# Altium PCB PCB1.PcbDoc
Units mil, origin at the board's own origin, x right, y up, seen from the top; angles counter-clockwise.
Board outline 5960 x 3955 mil, 2 copper layers (Top Layer, Bottom Layer); 43 components, 42 nets, 138 pads, 42 vias.
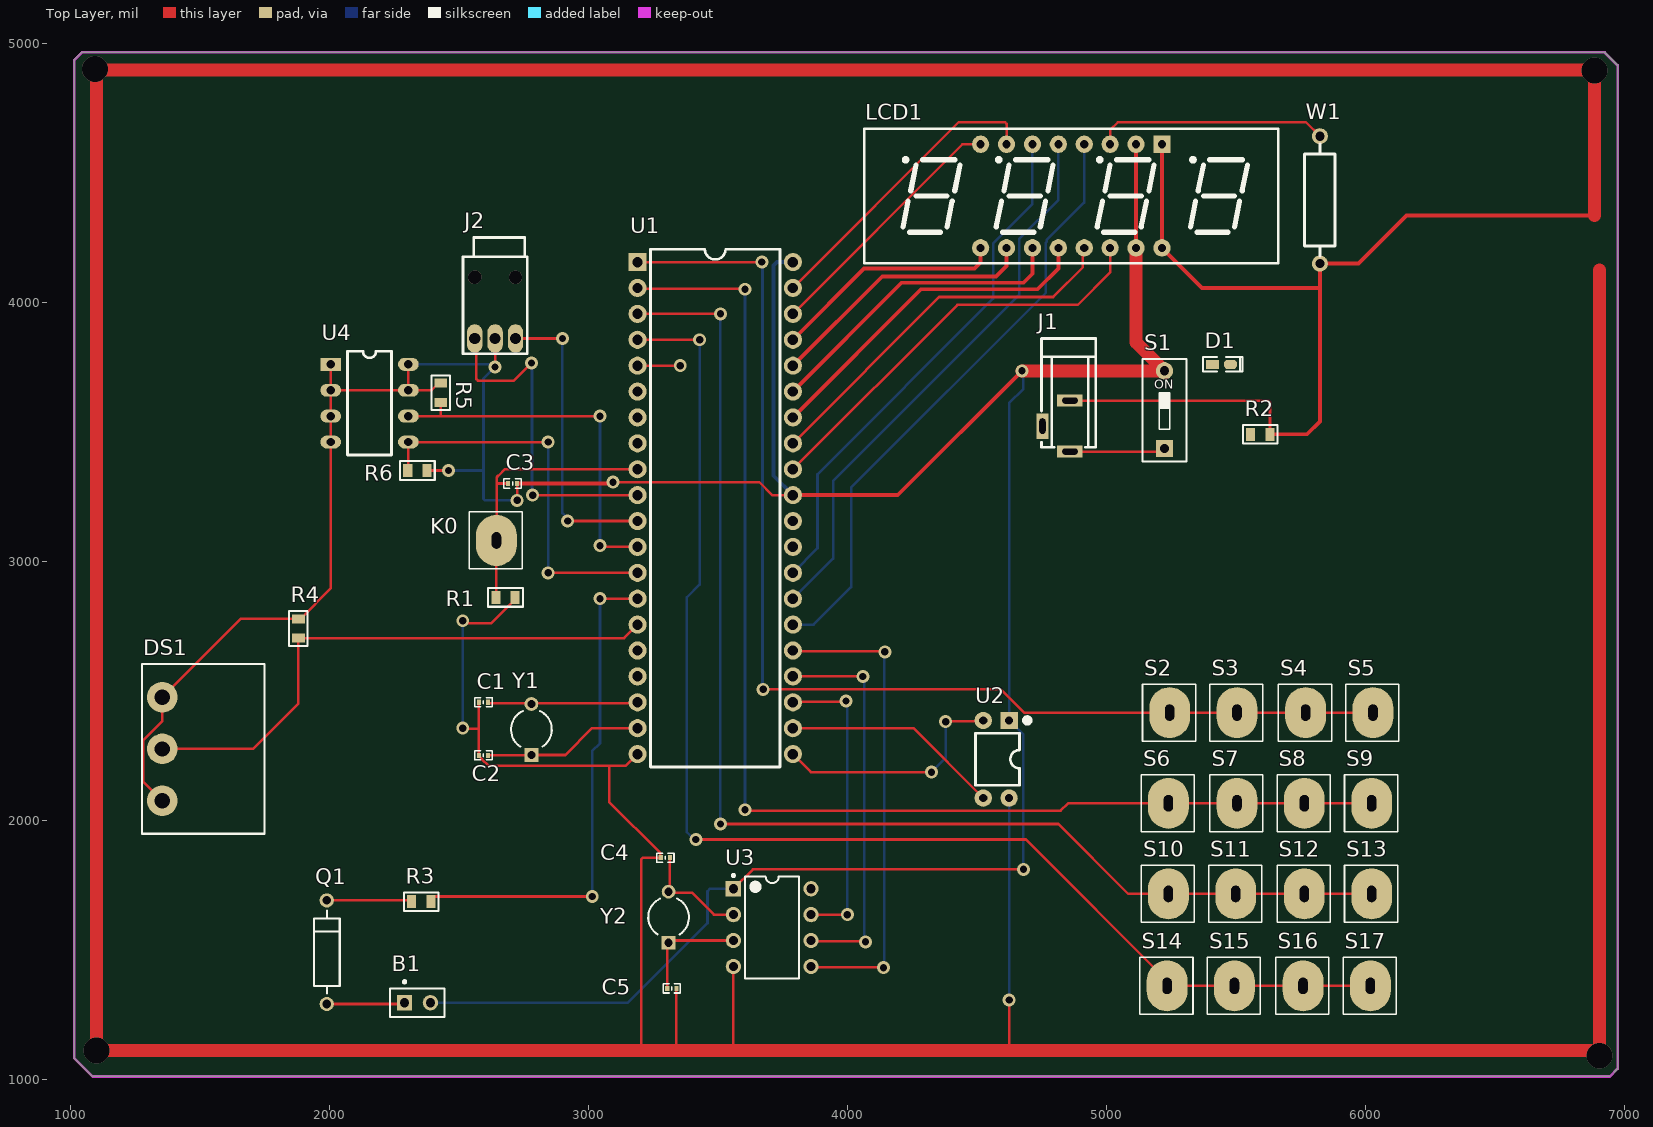
[diagram p0: Top Layer view]
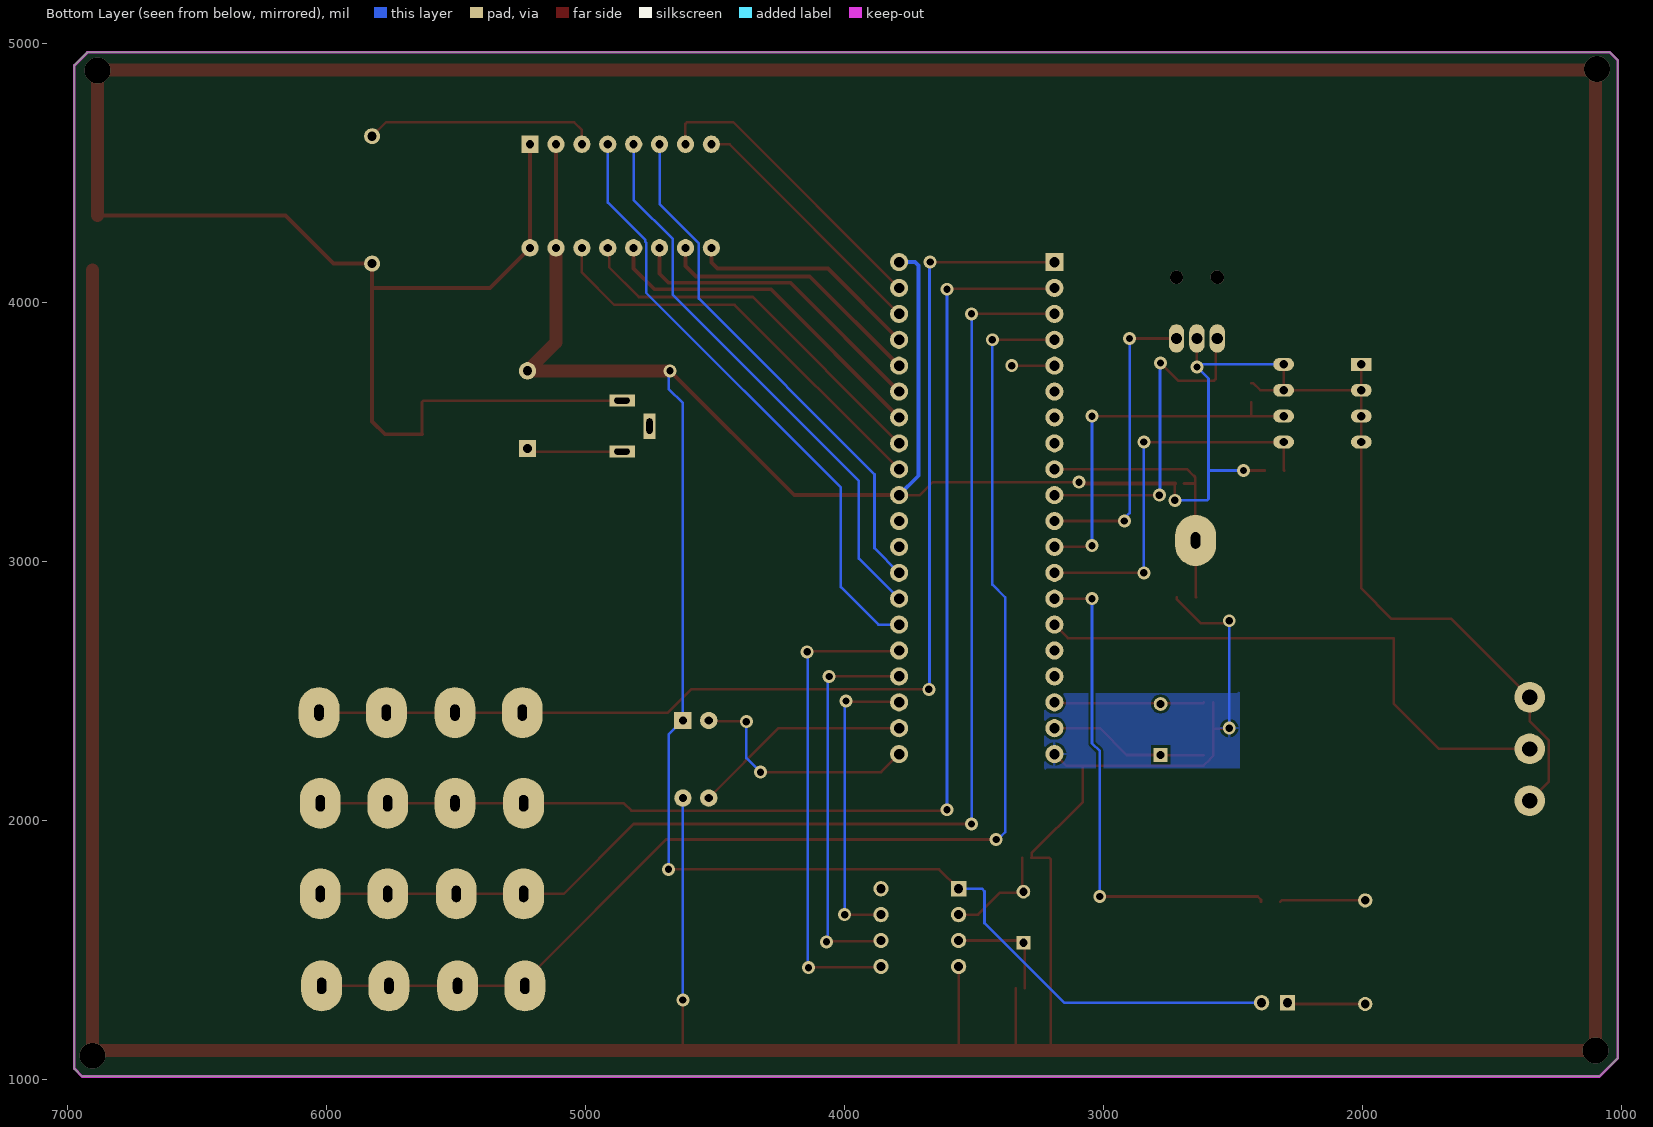
[diagram p1: Bottom Layer view, seen from below]
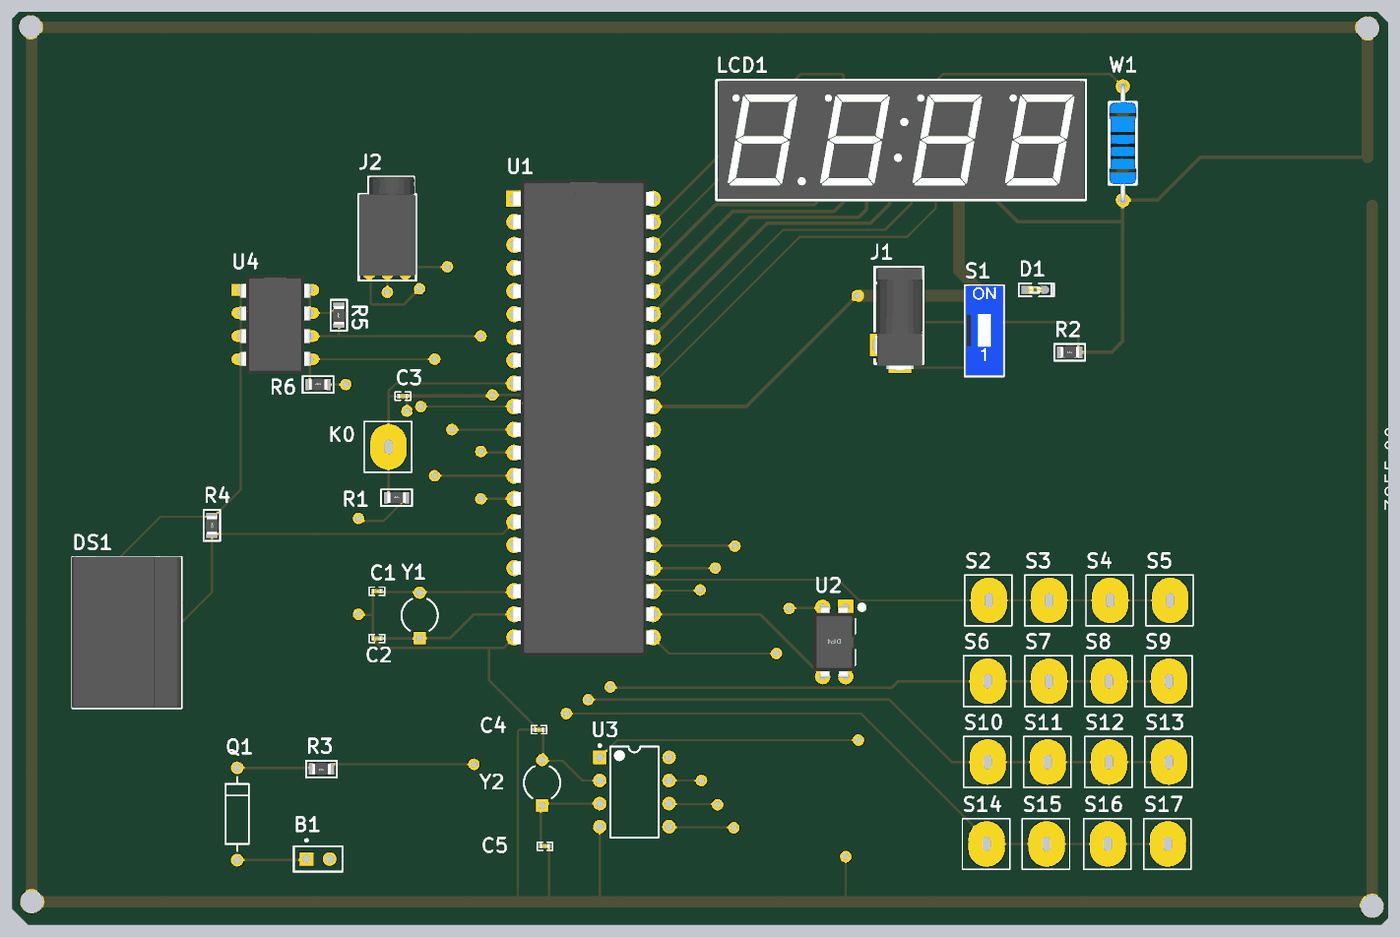
[diagram p2: 3D render of the assembled board from above, using the file's embedded part models]

## Layer stack, top to bottom
Top Solder: solder mask 0.4, Solder Resist, Dk 3.5
Top Layer: signal copper 1.4
Dielectric 1: dielectric 12.6, FR-4, Dk 4.8
Bottom Layer: signal copper 1.4
Bottom Solder: solder mask 0.4, Solder Resist, Dk 3.5

## Board outline
1015,1080 1015,4935 1045,4965 6925,4965 6975,4915 6975,1040 6945,1010 1085,1010

## Design rules (kind name [scope] priority, off if disabled: settings)
Clearance [All] p1: gap=10 ignorepadtopadclearanceinfootprint=FALSE except(0: Arc-Hole Track-Hole SMDPad-Hole THPad-Hole Via-Hole Fill-Hole Poly-Hole Region-Hole Text-Hole)
PolygonConnect [All] p1: connectstyle=Relief reliefconductorwidth=10 reliefentries=4 polygonreliefangle="90 Angle" airgapwidth=10
RoutingVias [All] p1: holewidth=28 width=50 viastyle="Through Hole" minholewidth=28 minwidth=50 maxholewidth=28 maxwidth=50
SolderMaskExpansion [All] p1: expansion=4 istentingtop=FALSE
Width [All] p1: maxlimit=50 minlimit=10 preferedwidth=10 minimp=50.000000 maximp=50.000000 favimp=50.000000
30 further rules are at their usual default settings.

## Components (designator, comment, footprint, x,y, rotation, side; value= is the part's Value field where it differs from the comment)
B1 "" PIN2 2290,1295 r0 top
C1 "22PF" "C 0402_L" 2595,2455 r180 top
C2 "22PF" "C 0402_L" 2595,2250 r0 top
C3 "10uF" "C 0402_L" 2707.28,3300 r180 top
C4 "22PF" "C 0402_L" 3297.29,1855 r0 top
C5 "22PF" "C 0402_L" 3322.29,1350 r0 top
D1 "LED" "LED 0603B" 5445,3760 r0 top
DS1 "DS18B20" CCM-5.08-3P 1276.26,1947.44 r90 top
J1 "5V电源接口" DC-002 4860,3620 r90 top
J2 "串口下载模块" DC-003A 2640,3860 r180 top
K0 "SW-PB" TTS-15.5*11.5-B 2650,3080 r0 top
LCD1 "LCD1602" "SMG 0.39-4P_B" 4865,4410 r180 top
Q1 "8550" DIODE-0.4 1990,1490 r90 top
R1 "10k" "R 0805_L" 2680,2860 r0 top
R2 "1K" "R 0805_L" 5595,3490 r0 top
R3 "10k" "R 0805_L" 2355,1685 r180 top
R4 "10k" "R 0805_L" 1880,2740 r270 top
R5 "10K" "R 0805_L" 2430,3650 r90 top
R6 "10K" "R 0805_L" 2340,3350 r0 top
S1 "SW-SPST" "CSW DIP-1P" 5225,3585 r0 top
S2 "" TTS-15.5*11.5-B 5250,2415 r0 top
S3 "" TTS-15.5*11.5-B 5510,2415 r0 top
S4 "" TTS-15.5*11.5-B 5775,2415 r0 top
S5 "" TTS-15.5*11.5-B 6035,2415 r0 top
S6 "" TTS-15.5*11.5-B 5245,2065 r0 top
S7 "" TTS-15.5*11.5-B 5510,2065 r0 top
S8 "" TTS-15.5*11.5-B 5770,2065 r0 top
S9 "" TTS-15.5*11.5-B 6030,2065 r0 top
S10 "" TTS-15.5*11.5-B 5245,1715 r0 top
S11 "" TTS-15.5*11.5-B 5505,1715 r0 top
S12 "" TTS-15.5*11.5-B 5770,1715 r0 top
S13 "" TTS-15.5*11.5-B 6030,1715 r0 top
S14 "" TTS-15.5*11.5-B 5240,1360 r0 top
S15 "" TTS-15.5*11.5-B 5500,1360 r0 top
S16 "" TTS-15.5*11.5-B 5765,1360 r0 top
S17 "" TTS-15.5*11.5-B 6025,1360 r0 top
U1 "CPU" DIP-40W 3190,4155 r0 top
U2 "HX711" DIP4-300 4575,2235 r270 top
U3 "DS1302+" P8+2 3710,1585 r0 top
U4 "24C00" DIP8 2005,3760 r0 top
W1 "10K" "RS 1/2W" 5825,4395 r90 top
Y1 "CRYSTAL" CAPR5-4X5 2780,2350 r90 top
Y2 "CRYSTAL" CAPR5-4X5 3310,1625 r90 top

## Footprints (in the part's own frame and the unit in brackets; to place one, negate y for a bottom-side part, rotate by r counter-clockwise, add the part's x,y. Pads: shape width x height; smd on the part's side, far side on the other; paste and mask are expansions set on the pad)
"C 0402_L" [mm] "无极性贴片电容"
  rect 0.4x0.5 smd: 1(-0.45,0) 2(0.45,0)
  silkscreen extent -0.85,-0.45 0.85,0.45, body extent -0.5,-0.26 0.5,0.26, height 0.53
CAPR5-4X5 [mm] "Capacitor; 2 Leads"
  rect 1.35x1.35 hole 0.8: 1(-2.5,0)
  round 1.35 hole 0.8: 2(2.5,0)
  silkscreen extent -1.69,-2 1.82,2
CCM-5.08-3P [mm] "蒜米工坊"
  round 3 hole 1.5: 1(3.24,-2) 2(8.32,-2) 3(13.4,-2)
  silkscreen extent 0,-12 16.64,0, body extent 0.06,-11.94 16.7,0.06, height 8.5
"CSW DIP-1P" [mm] "4.1*9.9*7mm"
  rect 1.7x1.7 hole 0.9: 1(0,-3.81)
  round 1.7 hole 0.9: 2(0,3.81)
  silkscreen extent -2.16,-5.08 2.16,4.95, body extent -2.05,-4.95 2.05,4.95, height 6.65
DC-002 [mm] "3.5*1.1mm,"
  rect 1.2x2.5 hole 0.6 slot 1.5 at 90 deg: 1(-5,0) 2(0,0)
  rect 2.5x1.2 hole 0.6 slot 1.5 at 0 deg: 3(-2.5,2.7)
  silkscreen extent -4.57,-2.54 6.1,2.79, body extent -5.3,-2.5 6,2.85, height 7.3
DC-003A [mm] "3.5*1.1mm"
  oval 1.5x2.8 hole 1.1: 1(0,0) 2(2,0) 3(-2,0)
  silkscreen extent -3.15,-9.9 3.15,1.5, body extent -3.15,-9.9 3.15,1, height 5.02
DIODE-0.4 [mm] "Diode, Thru-Hole; 2 Leads; 0.4 in Pin Spacing"
  round 1.4 hole 0.85: 1(-5.08,0) 2(5.08,0)
  silkscreen extent -4.06,-1.27 4.06,1.27
DIP4-300 [mm] "4.6*7.6*3.8(长宽高）"
  rect 1.7x1.7 hole 0.8: 1(-3.81,1.27)
  round 1.7 hole 0.8: 2(-3.81,-1.27) 3(3.81,-1.27) 4(3.81,1.27)
  silkscreen extent -4.06,-2.03 2.54,3.3, body extent -3.93,-2.29 3.94,2.29, height 4.5
DIP8 [mil] "8脚300mil直插集成电路（蒜米工坊）"
  rect 80x50 hole 32: 1(0,0)
  oval 80x50 hole 32: 2(0,-100) 3(0,-200) 4(0,-300) 5(300,-300) 6(300,-200) 7(300,-100) 8(300,0)
  silkscreen extent 65,-350 235,50, body extent -3,-363 303,63, height 177
DIP-40W [mil] "40脚600mil直插集成电路（蒜米工坊）"
  rect 70x70 hole 40: 1(0,0)
  round 70 hole 40: 2(0,-100) 3(0,-200) 4(0,-300) 5(0,-400) 6(0,-500) 7(0,-600) 8(0,-700) 9(0,-800) 10(0,-900) 11(0,-1000) 12(0,-1100) 13(0,-1200) 14(0,-1300) 15(0,-1400) 16(0,-1500) 17(0,-1600) 18(0,-1700) 19(0,-1800) 20(0,-1900) 21(600,-1900) 22(600,-1800) 23(600,-1700) 24(600,-1600) 25(600,-1500) 26(600,-1400) 27(600,-1300) 28(600,-1200) 29(600,-1100) 30(600,-1000) 31(600,-900) 32(600,-800) 33(600,-700) 34(600,-600) 35(600,-500) 36(600,-400) 37(600,-300) 38(600,-200) 39(600,-100) 40(600,0)
  silkscreen extent 50,-1950 550,50, body extent -6,-1981 606,81, height 185
"LED 0603B" [mil] "蓝色0603LED"
  rect 50x35 smd: 1(-35,0.26)
  oct 50x35 smd: 2(35,0.26)
  silkscreen extent -71,-28 81,28, body extent -31,-16 32,16, height 24
P8+2 [mm] "DIP, 8-Leads, Row Spacing 7.62mm, Pitch 2.54mm, Body 9.4x7mm"
  rect 1.5x1.5 hole 0.9: 1(-3.81,3.81)
  round 1.5 hole 0.9: 2(-3.81,1.27) 3(-3.81,-1.27) 4(-3.81,-3.81) 5(3.81,-3.81) 6(3.81,-1.27) 7(3.81,1.27) 8(3.81,3.81)
  silkscreen extent -3.93,-5 2.65,5.23, body extent -3.6,-4.95 3.6,4.95, height 4.57
PIN2 [mm] "Photosensitive Diode; 2 Leads"
  rect 1.5x1.5 hole 0.9: 1(0,0)
  round 1.5 hole 0.9: 2(2.54,0)
  silkscreen extent -1.4,-1.4 3.94,2.17
"R 0805_L" [mil] "1/8W贴片电阻"
  rect 35x50 smd: 1(-37.4,0) 2(37.4,0)
  silkscreen extent -67,-36 67,36, body extent -39,-25 39,25, height 20
"RS 1/2W" [mil] "直插色环电阻，脚距12.5mm，直径3mm"
  round 62 hole 35.43: 1(-246.06,0) 2(246.06,0)
  silkscreen extent -217,-59 217,59, body extent -256,-59 256,59, height 122
"SMG 0.39-4P_B" [mm] "40.2*13*7mm(长宽厚) 时钟型"
  rect 1.7x1.7 hole 0.8: 1(-8.89,-5.08)
  round 1.7 hole 0.8: 2(-6.35,-5.08) 3(-3.81,-5.08) 4(-1.27,-5.08) 5(1.27,-5.08) 6(3.81,-5.08) 7(6.35,-5.08) 8(8.89,-5.08) 9(8.89,5.08) 10(6.35,5.08) 11(3.81,5.08) 12(1.27,5.08) 13(-1.27,5.08) 14(-3.81,5.08) 15(-6.35,5.08) 16(-8.89,5.08)
  silkscreen extent -20.32,-6.6 20.32,6.6, body extent -20.09,-6.5 20.09,6.5, height 7
TTS-15.5*11.5-B [mm] "弹簧按键15.5mm*11.5mm(直径*高度）"
  oval 4x5 hole 0.9 slot 1.6 at 90 deg: 1(-0.127,0)
  silkscreen extent -2.79,-2.79 2.41,2.79

## Part data
B1: library part BELL, "Bell"
C1 C2 C4 C5: library part CAP, "Capacitor"
C3: library part "Cap Pol1", "Polarized Capacitor (Radial)", LatestRevisionDate=17-Jul-2002, LatestRevisionNote="Re-released for DXP Platform.", PackageReference=RB7.6-15, Published=8-Jun-2000, Publisher="Altium Limited"
J1: library part PWR2.5, "Low Voltage Power Supply Connector"
J2: library part STC-ISP
K0: "Switch", LatestRevisionDate=17-Jul-2002, LatestRevisionNote="Re-released for DXP Platform.", PackageReference=SPST-2, Published=24-Mar-1999, Publisher="Altium Limited"
Q1: library part 2N3906, "PNP General Purpose Amplifier"
R1 R2 R3 R4 R5 R6: library part RES2
S2 S3 S4 S5 S6 S7 S8 S9 S10 S11 S12 S13 S14 S15 S16 S17: library part SW-PB
U1: library part 8031
U3: library part CMP-0254-00144-1, "Trickle-Charge Timekeeping Chip, 8-Pin PDIP, 0 to 70 degC, Pb-Free", Code_JEDEC=MS-001-AB, ComponentLink1Description="Manufacturer URL", ComponentLink1URL=http://www.maxim-ic.com, ComponentLink2Description=Datasheet, ComponentLink2URL=http://datasheets.maxim-ic.com/en/ds/DS1302.pdf, ComponentLink3Description="Package Specification", ComponentLink3URL=http://pdfserv.maxim-ic.com/package_dwgs/21-0043.PDF, DatasheetVersion=12-Feb-2008, PackageDescription="8-Pin Plastic Dual-In-Line, Narrow (0.3in), Pitch 2.54 mm, PDIP(N), Pb-Free", PackageReference=P8+2, PackageVersion="revE, 2011"
W1: library part POT2, "Potentiometer"
Y1 Y2: "Crystal"

## Via types
v1: diameter 50, hole 28, Top Layer to Bottom Layer, 36 vias
v2: diameter 100, hole 100, Top Layer to Bottom Layer, 4 vias
v3: diameter 51.18, hole 51.18, Top Layer to Bottom Layer, 2 vias

## Nets (pads, with @x,y where several pads share a name; then routed paths per layer and width w, separated by ;. In a path a pad name is that pad's centre, name@x,y a point inside that pad or via, vN(x,y) a via of type N, cw(c..) or ccw(c..) an arc to the next point about the centre after c; other vN are vias at no path point)
GND: C1.2 C2.1 C4.1 C5.2 J1.2 LCD1.1 LCD1.16 R1.2 R2.2 U1.20 U2.4 U3.4 W1.1 | length 27252
  Top Layer w10: v1(2515,2355) 2517.5,2352.5 2577.29,2352.5 ; v1@2515,2760 2624.9,2760 2717.4,2852.5 R1.2 ; C1.2 2577.29,2352.5 ; U1.20 3145,2210 3080,2210 ; 3200,1110 3205,1115 3205,1849.15 3210.86,1855 C4.1 3277.82,1856.75 3277.82,1872.18 3080,2070 3080,2210 ; 3340,1110 C5.2 ; U3.4 3560,1115 3565,1110 ; 4625,1110 v1(4625,1305) ; J1.2 5626.54,3620 5632.4,3614.14 R2.2 ; 2577.29,2352.5 C2.1 2577.28,2248.03 2589.84,2235.48 2589.84,2233.94 2613.78,2210 3080,2210
  Top Layer w15: LCD1.1 LCD1.16 5370,4055 5825,4055 ; R2.2 5775,3490 5825,3540 5825,4055 ; 6885,4335 6160,4335 5973.94,4148.94 W1.1 5825,4055
  Top Layer w50: v2@1097.5,4897.5 6882.5,4897.5 v2(6885,4895) 6885,4335 ; v2@1100,4895 v2(1100,1110) 3200,1110 3340,1110 3565,1110 4625,1110 v2@6871.47,1110 ; v2(6905,1090) 6905,4125
  Bottom Layer w10: v1(2515,2355) v1(2515,2770) ; v1(4625,1305) U2.4
  other v2: 1095,4900
NetB1_1: B1.1 Q1.1 | length 302.1
  Top Layer w10: Q1.1 2285,1290 B1.1
NetC1_1: C1.1 U1.18 Y1.2 | length 583
  Top Layer w10: C1.1 2612.72,2454.59 2615.59,2451.71 2776.71,2451.71 Y1.2 2783.29,2451.71 3186.71,2451.71 U1.18
NetC2_2: C2.2 U1.19 Y1.1 | length 620.8
  Top Layer w10: C2.2 2778.42,2250 Y1.1 2911.57,2251.57 3015,2355 U1.19
NetC3_2: C3.2 K0.1 R1.1 U1.9 | length 1066.2
  Top Layer w10: R1.1 2645,2862.4 K0.1 2646.36,3081.36 2646.36,3300 ; C3.2 2646.36,3300 ; U1.9 2677.72,3355 2652.56,3329.84 2650.59,3329.84 2647.71,3326.97 2647.71,3325 2646.36,3323.64 2646.36,3300
NetC4_2: C4.2 U3.2 Y2.2 | length 420.3
  Top Layer w10: C4.2 3315,1728.42 Y2.2 3313.43,1720 3400,1720 3485,1635 U3.2
NetC5_1: C5.1 U3.3 Y2.1 | length 432.3
  Top Layer w10: C5.1 3304.57,1521.15 3318.43,1535 U3.3
NetD1_K: R2.1
NetJ1_1: J1.1 S1.1 | length 369.9
  Top Layer w10: J1.1 5213.15,3423.15 S1.1
NetJ2_2: J2.2 U1.10 | length 1319.2
  Top Layer w10: J2.2 2567.51,3853.75 2567.51,3703.35 2573.37,3697.49 2712.49,3697.49 v1(2780,3765) ; v1(2785,3255) U1.10
  Bottom Layer w10: v1(2780,3765) 2782.5,3762.5 2782.5,3257.5 v1(2785,3255)
NetJ2_3: J2.3 U1.11 | length 1164.5
  Top Layer w10: J2.3 v1(2900,3860) ; v1(2920,3155) U1.11
  Bottom Layer w10: v1(2900,3860) 2900,3185.82 2920,3165.82 v1(2920,3155)
NetLCD1_3: LCD1.3 W1.2 | length 899.8
  Top Layer w10: LCD1.3 5015,4665 5045,4695 5771.06,4695 W1.2
NetLCD1_4: LCD1.4 U1.26 | length 2367.9
  Bottom Layer w10: U1.26 3870,2755 4015,2900 4015,3285 4766.54,4036.54 4766.54,4230.07 4770,4233.54 4770,4240 4915,4385 LCD1.4
NetLCD1_5: LCD1.5 U1.27 | length 2179.6
  Bottom Layer w10: U1.27 3945,3010 3945,3310 4663.46,4028.46 4663.46,4243.46 4815,4395 LCD1.5
NetLCD1_6: LCD1.6 U1.28 | length 2038.1
  Bottom Layer w10: U1.28 3885,3050 3885,3335 4563.46,4013.46 4563.46,4227 4715,4378.54 LCD1.6
NetLCD1_7: LCD1.7 U1.39 | length 1171.7
  Top Layer w10: U1.39 4430,4695 4609.14,4695 4615,4689.14 LCD1.7
NetLCD1_8: LCD1.8 U1.38 | length 996.3
  Top Layer w10: U1.38 4445,4610 LCD1.8
NetLCD1_9: LCD1.9 U1.37 | length 905
  Top Layer w15: U1.37 4065,4130 4491.21,4130 4515,4153.79 LCD1.9
NetLCD1_10: LCD1.10 U1.36 | length 1054.5
  Top Layer w15: U1.36 4135,4100 4575,4100 4615,4140 LCD1.10
NetLCD1_11: LCD1.11 U1.35 | length 1213.5
  Top Layer w15: U1.35 4210,4075 4680,4075 4715,4110 LCD1.11
NetLCD1_12: LCD1.12 U1.34 | length 1343.2
  Top Layer w15: U1.34 4285,4050 4735,4050 4815,4130 LCD1.12
NetLCD1_13: LCD1.13 U1.33 | length 1478.7
  Top Layer w10: U1.33 4355,4020 4795,4020 4910,4135 4910,4205 LCD1.13
NetLCD1_14: LCD1.14 U1.32 | length 1634.8
  Top Layer w10: U1.32 4425,3990 4890,3990 5015,4115 LCD1.14
NetQ1_2: Q1.2 R3.2 | length 329.7
  Top Layer w10: Q1.2 2312.6,1690 R3.2
NetU1_21: U1.21 U2.2 | length 928.8
  Top Layer w10: U1.21 3860,2185 v1(4325,2185) ; v1(4380,2380) 4382.5,2382.5 4522.5,2382.5 U2.2
  Bottom Layer w10: v1(4325,2185) 4380,2240 v1(4380,2380)
NetU1_22: U1.22 U2.3 | length 846.8
  Top Layer w10: U1.22 4255,2355 U2.3
P10: S2.1 S3.1 S4.1 S5.1 U1.1 | length 4524.4
  Top Layer w10: U1.1 v1(3670,4155) ; v1(3675,2505) 4593.14,2505 4683.14,2415 S2.1 S3.1 S4.1 S5.1
  Bottom Layer w10: v1(3670,4155) 3672.5,4152.5 3672.5,2507.5 v1(3675,2505)
P11: S6.1 S7.1 S8.1 S9.1 U1.2 | length 4873.9
  Top Layer w10: U1.2 3192.5,4052.5 3602.5,4052.5 v1(3605,4050) ; v1@3590,2036.54 3605,2036.54 4824.17,2036.54 4852.63,2065 S6.1 S7.1 S8.1 S9.1
  Bottom Layer w10: v1(3605,2040) v1(3605,4050)
P12: S10.1 S11.1 S12.1 S13.1 U1.3 | length 4916.8
  Top Layer w10: U1.3 v1(3510,3955) ; v1(3510,1985) 4815,1985 5085,1715 S10.1 S11.1 S12.1 S13.1
  Bottom Layer w10: v1(3510,1985) v1(3510,3955)
P13: S14.1 S15.1 S16.1 S17.1 U1.4 | length 5059.5
  Top Layer w10: U1.4 v1(3430,3855) ; v1(3415,1925) 4689.69,1925 5235,1379.68 S14.1 S15.1 S16.1 S17.1
  Bottom Layer w10: v1(3415,1925) 3408.64,1925 3380,1953.64 3380,2860 3430,2910 v1(3430,3855)
P14: U1.5 | length 165
  Top Layer w10: U1.5 v1(3355,3755)
P15: U1.6
P16: U1.7
P17: U1.8
P23: U1.23 U3.7 | length 1164.1
  Top Layer w10: U1.23 3792.5,2457.5 3992.5,2457.5 v1(3995,2460) ; U3.7 v1@3990,1635
  Bottom Layer w10: v1(3995,2460) 4000,2455 v1(4000,1635)
P24: U1.24 U3.6 | length 1501.2
  Top Layer w10: U1.24 v1@4050,2555 ; U3.6 3862.5,1532.5 4067.5,1532.5 v1(4070,1530)
  Bottom Layer w10: v1(4060,2555) 4065,2550 4065,1535 v1(4070,1530)
P25: U1.25 U3.5 | length 1861.2
  Top Layer w10: U1.25 3792.5,2652.5 4142.5,2652.5 v1(4145,2650) ; U3.5 3862.5,1432.5 4137.5,1432.5 v1(4140,1430)
  Bottom Layer w10: v1(4140,1430) 4142.5,1432.5 4142.5,2647.5 v1(4145,2650)
P34: R3.1 U1.14 | length 1942.7
  Top Layer w10: R3.1 2392.4,1692.5 2404.9,1705 v1(3015,1705) ; v1(3045,2855) U1.14
  Bottom Layer w10: v1(3015,1705) 3015,2266.17 3045,2296.17 v1(3045,2855)
P35: DS1.2 R4.2 U1.15 | length 2181.7
  Top Layer w10: DS1.2 1704.9,2275 1880,2450.1 R4.2 3137.6,2702.6 U1.15
SCL: R5.1 U1.12 U4.6 | length 1447.6
  Top Layer w10: U4.6 2430,3560 ; R5.1 2430,3560 ; v1@3035,3055 U1.12 ; v1(3045,3560) 2430,3560
  Bottom Layer w10: v1(3045,3060) v1(3045,3560)
SDA: R6.1 U1.13 U4.5 | length 1516
  Top Layer w10: R6.1 2305,3352.4 U4.5 v1(2845,3460) ; v1@2830,2955 v1(2845,2955) U1.13
  Bottom Layer w10: v1(2845,2955) v1(2845,3460)
VCC: B1.2 C3.1 DS1.1 DS1.3 J2.1 LCD1.2 LCD1.15 R4.1 R5.2 R6.2 S1.2 U1.31 U1.40 U2.1 U3.1 U4.1 U4.2 U4.3 U4.4 U4.7 U4.8 | length 13251.7
  Top Layer w10: DS1.1 1280.94,2149.06 1280.94,2308.01 1355,2382.06 DS1.3 1657.4,2777.4 R4.1 1887.5,2777.4 2005,2894.91 U4.4 U4.3 U4.2 ; U4.1 U4.2 ; U4.8 U4.7 ; R6.2 v1(2460,3350) ; R5.2 2422.5,3687.4 2395.1,3660 U4.7 ; v1(2640,3750) J2.1 ; v1@2725,3245 C3.1 ; v1(3095,3305) 3660,3305 3710,3255 U1.31 ; U3.1 3635,1810 v1(4680,1810) ; U4.2 U4.7
  Top Layer w15: C3.1 v1@3090,3300 ; U1.31 4195,3255 v1(4675,3735) ; LCD1.15 LCD1.2
  Top Layer w50: v1(4675,3735) S1.2 5115,3845 LCD1.15
  Bottom Layer w10: U4.8 2619.18,3760 2629.18,3750 v1(2640,3750) 2595,3705 2595,3345 ; B1.2 3152.79,1295 3460,1602.21 3460,1725 3470,1735 U3.1 ; v1(2460,3350) 2590,3350 2595,3345 ; v1(2725,3235) 2600.86,3235 2595,3240.86 2595,3345 ; v1(4675,3735) 4680,3730 4680,3665 4625,3610 U2.1 4680,2330 v1(4680,1810)
  Bottom Layer w15: U1.31 3715,3330 3715,4141.21 3728.79,4155 U1.40
pads on no net: D1.1 D1.2 J1.3 U1.16 U1.17 U1.29 U1.30 U3.8
copper on no net:
  other v3: 2561.26,4096.22 2718.74,4096.22

## Polygon pours and split planes (outlines as drawn)
GND on Bottom Layer "GND_L02_P000" (solid, remove dead copper, pour order 0): 2475,2500 2485,2490 3230,2490 3230,2200 3225,2195 3220,2200 2475,2200

## Keep-outs
Keep-Out Layer:
  the board outline again, w10

## Dimensions
1020,5035 to 6975,5110 on Top Overlay
7045,4965 to 7080,1010 on Top Overlay

## Text inside footprints (layer, text, board x,y; h text height)
S1: Top Overlay "ON" at 5185,3655 h60